# EAGLE board ATEMconsole-encoder (EAGLE 6.2)
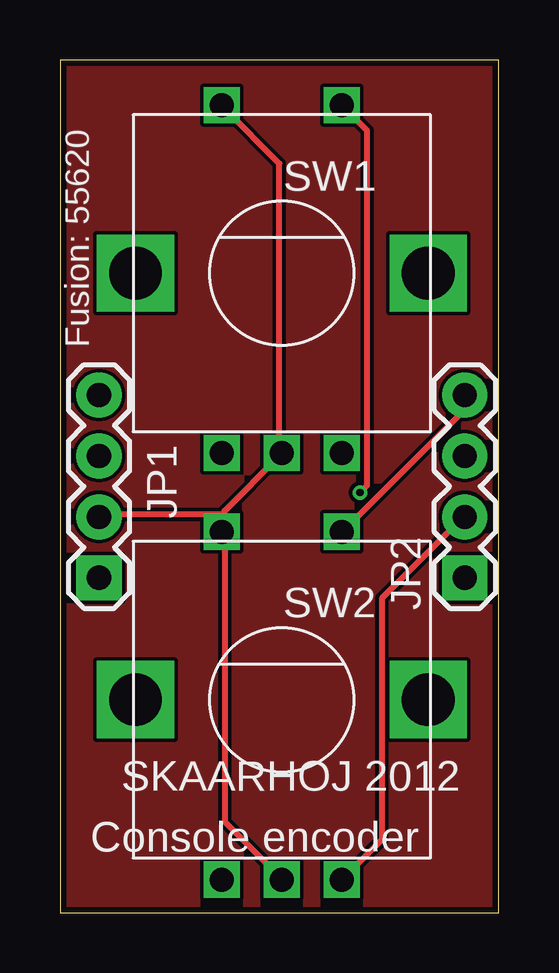
[diagram p0: board, top side]
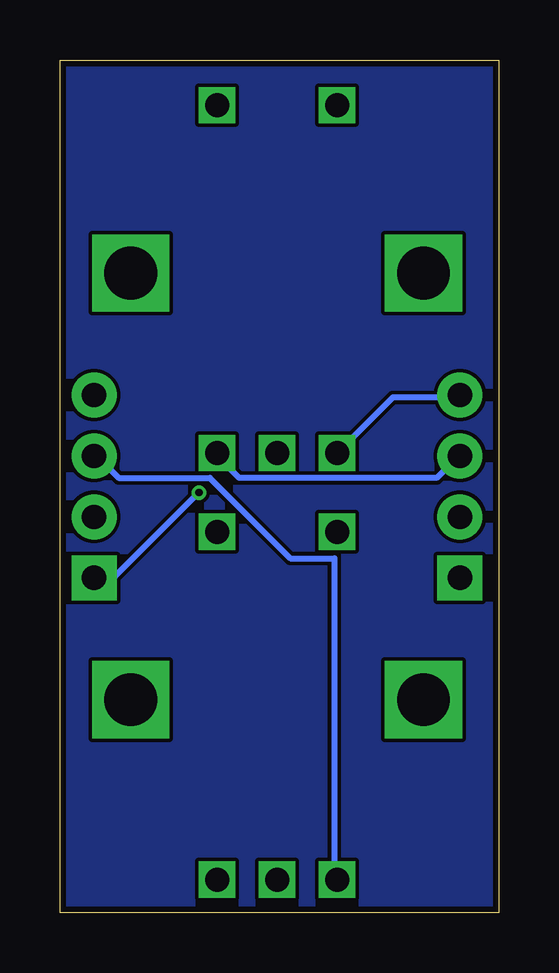
[diagram p1: board, bottom side, seen from below]

Size 18.29 x 35.56 mm. Coordinates in mm from the lower left corner, seen from the top.
Outline: 0,0 18.29,0 18.29,35.56 0,35.56 0,0
Copper layers (1*16): Top 0.035mm / dielectric 1.5mm / Bottom 0.035mm
Design rules: minimum track width 6mil, minimum drill 12mil, track to track 6mil, track to pad 6mil, pad to pad 6mil, via to via 6mil, smd to smd 0mil, copper to edge 10mil, drill to drill 10mil, minimum pad ring 10mil, minimum via ring 6mil, stop-mask expansion 2mil, vias tented up to drill 100mil, thermal gap 10mil
Net classes: 0 default: width 0.254 mm; 1 Power: width 0.254 mm

## Footprints (pad centres in the part's own frame; a part is rotated, then mirrored left to right if it is on the bottom)
1X04 = drill 1.016 pad 1.88 square: 1 0,0 | drill 1.016 pad 1.88: 2 2.54,0; 3 5.08,0; 4 7.62,0
ALPS_EC12E_SW = drill 1 square: A -2.5,-7.5; B 2.5,-7.5; C 0,-7.5; D -2.5,7; E 2.5,7 | drill 2.2 square: GND1 -6.1,0; GND2 6.1,0

## Placement (x,y rotation side)
JP1  [1X04]  1.63,13.97 90 top
JP2  [1X04]  16.87,13.97 90 top
SW1  EC12E_SW  [ALPS_EC12E_SW]  9.25,26.67 0 top
SW2  EC12E_SW  [ALPS_EC12E_SW]  9.25,8.89 0 top

## Library data of the parts
JP1 JP2 = SparkFun
SW1 SW2 = switch-alps; MPN: EC12E2424407; OC_FARNELL: 1520813; OC_NEWARK: 74M1068

## Nets
5V [Power]: JP1.2 SW1.C SW1.D SW2.C SW2.D
JP1: JP2.2 SW2.B
N$127: JP1.3 SW1.B
N$128: JP1.4 SW1.A
N$129: JP2.1 SW1.E
N$130: JP2.3 SW2.A
N$131: JP2.4 SW2.E

## Tracks (layer width: path | path; a pad name or v marks a point on that pad's centre or on a via)
5V
  Top 0.254: SW2.C 9.14,1.52 6.86,3.81 6.86,15.85 SW2.D | 6.86,16.61 6.86,16 SW2.D | 6.86,16.61 6.86,16.76 9.14,19.05 SW1.C 9.14,19.2 9.14,31.24 6.86,33.53 SW1.D | 6.86,16.61 1.68,16.61 JP1.2 | 6.86,16.61 SW2.D
JP1
  Top 0.254: SW2.B 11.89,1.52 13.41,3.05 13.41,13.11 16.76,16.46 JP2.2
N$1
  pour Bottom: 0,35.56 18.29,35.56 18.29,0 0,0
N$2
  pour Top: 0,35.56 18.29,35.56 18.29,0 0,0
N$127
  Bottom 0.254: SW1.B 11.73,19.05 10.82,18.14 2.59,18.14 1.68,19.05 JP1.3
N$128
  Bottom 0.254: SW1.A 6.71,19.2 4.42,21.49 1.68,21.49 JP1.4
N$129  (via drill 0.3)
  Top 0.254: v12.5,17.53 12.8,17.83 12.8,32.61 11.89,33.53 SW1.E
  Bottom 0.254: v12.5,17.53 16,14.02 16.76,14.02 JP2.1
N$130
  Bottom 0.254: SW2.A 6.86,1.52 6.86,14.78 8.69,14.78 12.04,18.14 15.85,18.14 16.76,19.05 JP2.3
N$131
  Top 0.254: SW2.E 11.89,16 16.76,20.88 16.76,21.49 JP2.4

## Text on the board
_tsilk: Fusion: 55620 | SKAARHOJ 2012 | Console encoder